# Altium PCB KCORES-FlexibleLOM-Adapter.pcbdoc
Units mm, origin at the board's own origin, x right, y up, seen from the top; angles counter-clockwise.
Board outline 131.32 x 67.56 mm, 2 copper layers (Top Layer, Bottom Layer); 3 components, 44 nets, 197 pads, 239 vias.
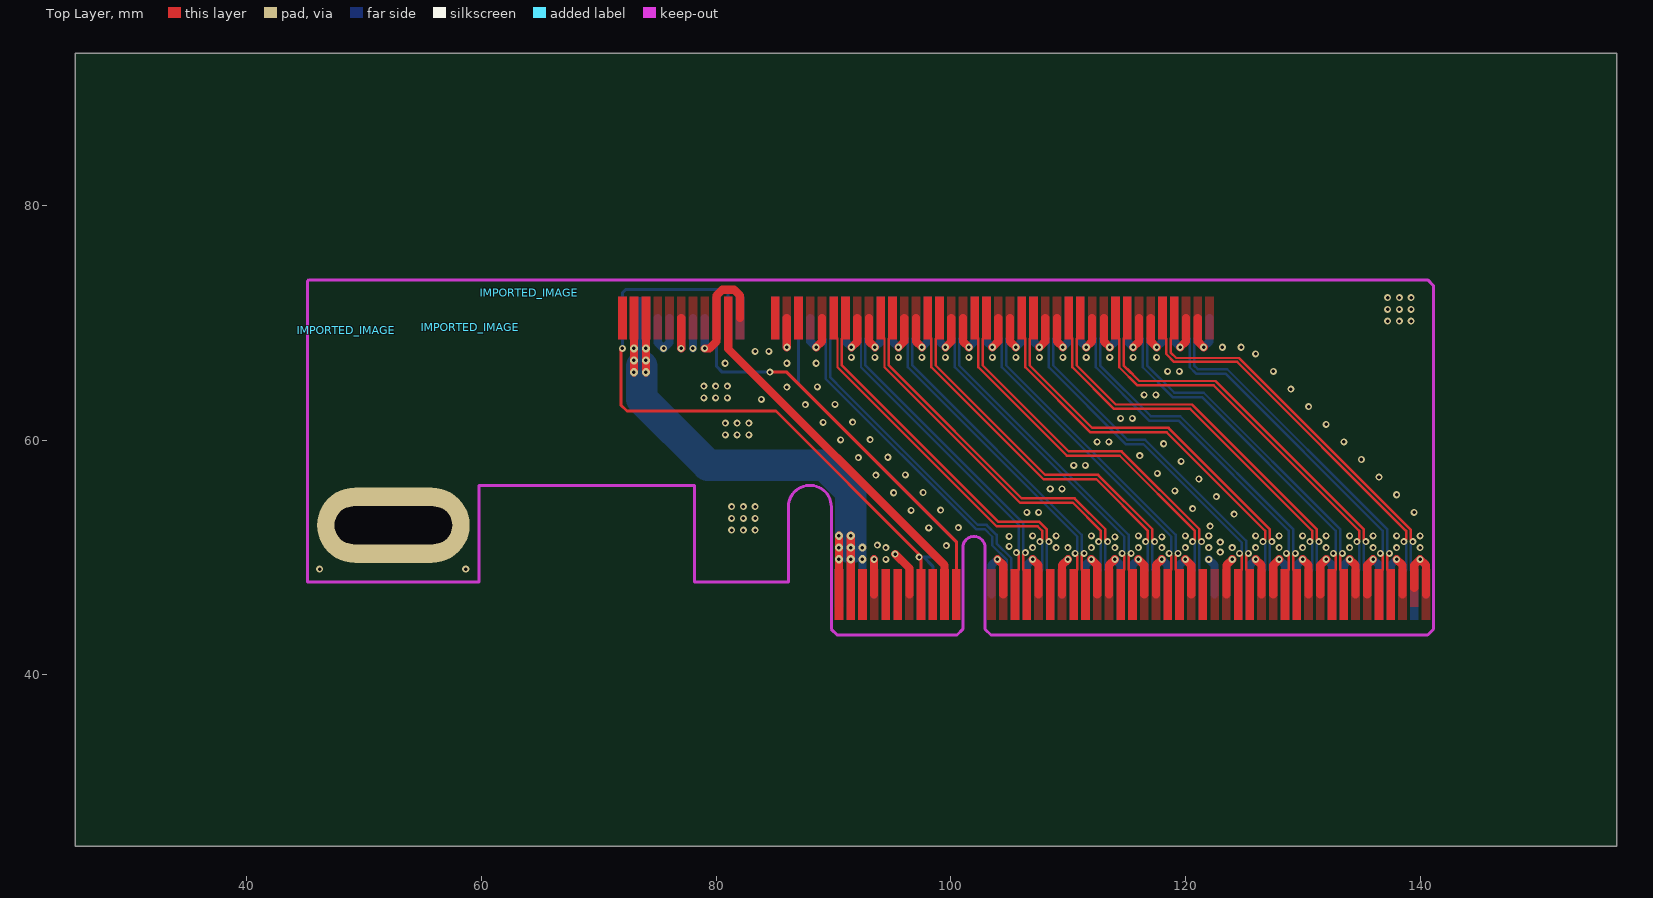
[diagram p0: Top Layer view]
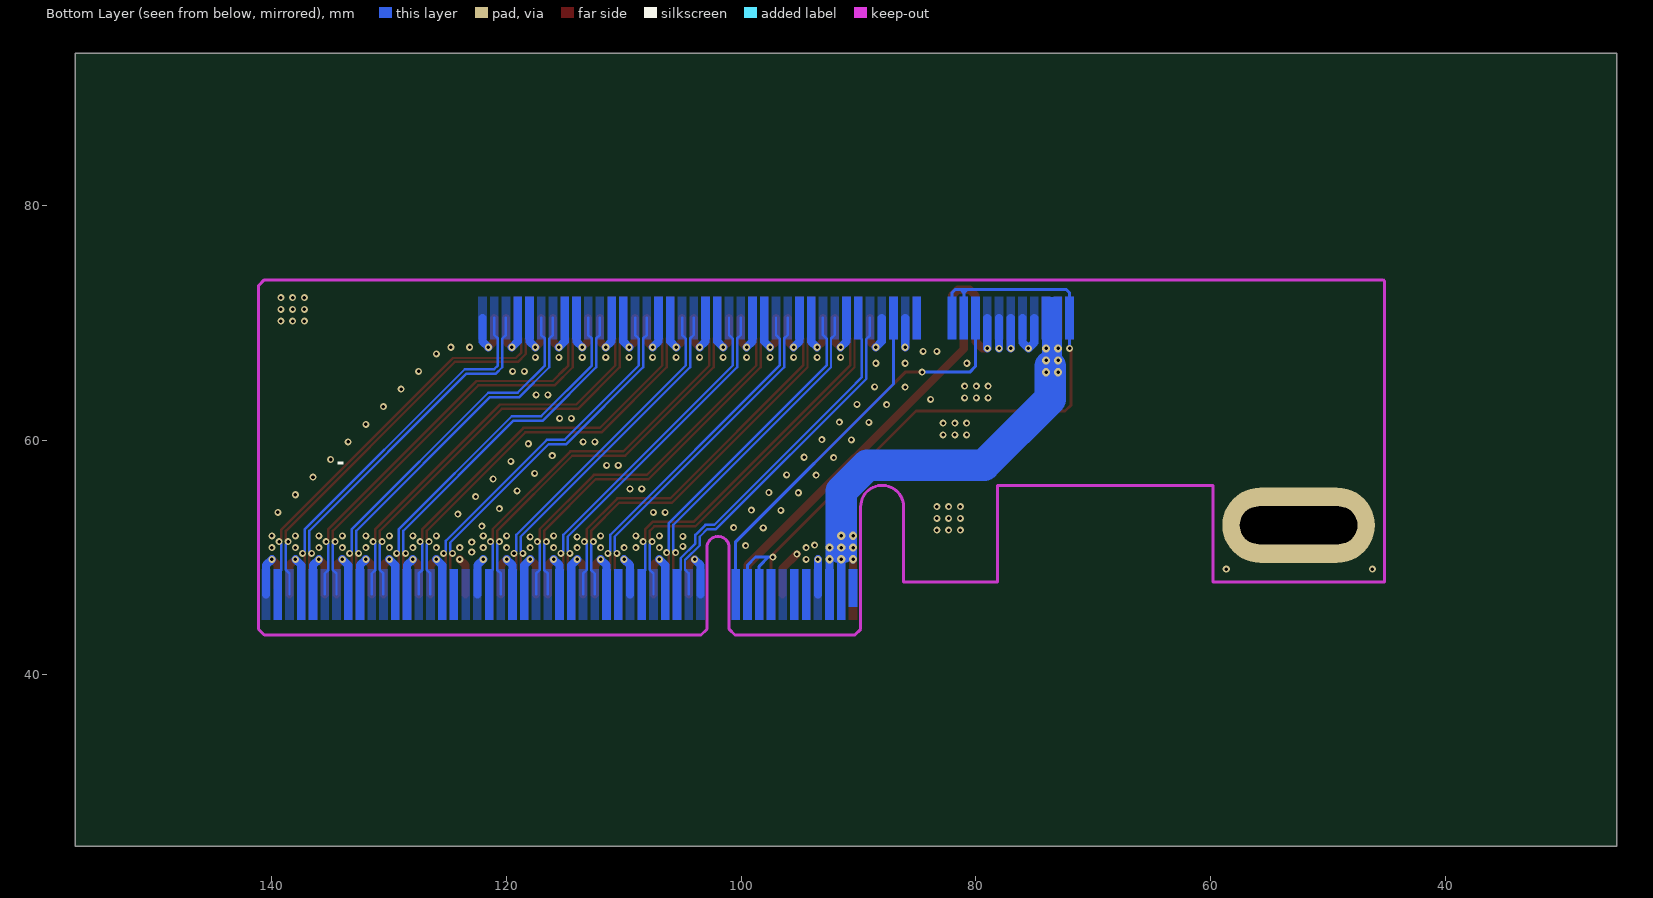
[diagram p1: Bottom Layer view, seen from below]

## Layer stack, top to bottom
Top Layer: signal copper (thickness not stored)
Dielectric: dielectric 0.32, FR-4, Dk 4.8
Bottom Layer: signal copper (thickness not stored)

## Board outline
156.718,25.4 25.4,25.4 25.4,92.964 156.718,92.964

## Components (designator, comment, footprint, x,y, rotation, side; value= is the part's Value field where it differs from the comment)
IMPORTED_IMAGE "IMPORTED_IMAGE" IMPORTED_IMAGE 48.513,69.378 r0 top
IMPORTED_IMAGE "IMPORTED_IMAGE" IMPORTED_IMAGE 59.067,69.615 r0 top
IMPORTED_IMAGE "IMPORTED_IMAGE" IMPORTED_IMAGE 64.1,72.542 r0 top

## Footprints (in the part's own frame and the unit in brackets; to place one, negate y for a bottom-side part, rotate by r counter-clockwise, add the part's x,y. Pads: shape width x height; smd on the part's side, far side on the other; paste and mask are expansions set on the pad)
IMPORTED_IMAGE [mm]

## Free pads (board coordinates)
  round 0 smd far side: A1(72.022,70.41) A1(90.456,47.4) A2(73.022,70.41) A2(91.456,46.85) A3(74.022,70.41) A3(92.456,46.85) A4(75.022,70.41) A4(93.456,46.85) A5(76.022,70.41) A5(94.456,46.85) A6(77.022,70.41) A6(95.456,46.85) A7(78.022,70.41) A7(96.456,46.85) A8(79.022,70.41) A8(97.456,46.85) A9(80.022,70.41) A9(98.456,46.85) A10(81.022,70.41) A10(99.456,46.85) A11(82.022,70.41) A11(100.456,46.85) A12(85.022,70.41) A12(103.456,46.85) A13(86.022,70.41) A13(104.456,46.85) A14(87.022,70.41) A14(105.456,46.85) A15(88.022,70.41) A15(106.456,46.85) A16(89.022,70.41) A16(107.456,46.85) A17(90.022,70.41) A17(108.456,46.85) A18(91.022,70.41) A18(109.456,46.85) A19(92.022,70.41) A19(110.456,46.85) A20(93.022,70.41) A20(111.456,46.85) A21(94.022,70.41) A21(112.456,46.85) A22(95.022,70.41) A22(113.456,46.85) A23(96.022,70.41) A23(114.456,46.85) A24(97.022,70.41) A24(115.456,46.85) A25(98.022,70.41) A25(116.456,46.85) A26(99.022,70.41) A26(117.456,46.85) A27(100.022,70.41) A27(118.456,46.85) A28(101.022,70.41) A28(119.456,46.85) A29(102.022,70.41) A29(120.456,46.85) A30(103.022,70.41) A30(121.456,46.85) A31(104.022,70.41) A31(122.456,46.85) A32(105.022,70.41) A32(123.456,46.85) A33(106.022,70.41) A33(124.456,46.85) A34(107.022,70.41) A34(125.456,46.85) A35(108.022,70.41) A35(126.456,46.85) A36(109.022,70.41) A36(127.456,46.85) A37(110.022,70.41) A37(128.456,46.85) A38(111.022,70.41) A38(129.456,46.85) A39(112.022,70.41) A39(130.456,46.85) A40(113.022,70.41) A40(131.456,46.85) A41(114.022,70.41) A41(132.456,46.85) A42(115.022,70.41) A42(133.456,46.85) A43(116.022,70.41) A43(134.456,46.85) A44(117.022,70.41) A44(135.456,46.85) A45(118.022,70.41) A45(136.456,46.85) A46(119.022,70.41) A46(137.456,46.85) A47(120.022,70.41) A47(138.456,46.85) A48(121.022,70.41) A48(139.456,46.85) A49(122.022,70.41) A49(140.456,46.85)
  round 0 smd: B1(72.022,70.41) B1(90.456,46.85) B2(72.995,70.41) B2(91.456,46.85) B3(74.022,70.41) B3(92.456,46.85) B4(75.022,70.41) B4(93.456,46.85) B5(76.022,70.41) B5(94.456,46.85) B6(77.022,70.41) B6(95.456,46.85) B7(78.022,70.41) B7(96.456,46.85) B8(79.022,70.41) B8(97.456,46.85) B9(80.022,70.41) B9(98.456,46.85) B10(81.022,70.41) B10(99.456,46.85) B11(82.022,70.41) B11(100.456,46.85) B12(85.022,70.41) B12(103.456,46.85) B13(86.022,70.41) B13(104.456,46.85) B14(87.022,70.41) B14(105.456,46.85) B15(88.022,70.41) B15(106.456,46.85) B16(89.022,70.41) B16(107.456,46.85) B17(90.022,70.41) B17(108.456,46.85) B18(91.022,70.41) B18(109.456,46.85) B19(92.022,70.41) B19(110.456,46.85) B20(93.022,70.41) B20(111.456,46.85) B21(94.022,70.41) B21(112.456,46.85) B22(95.022,70.41) B22(113.456,46.85) B23(96.022,70.41) B23(114.456,46.85) B24(97.022,70.41) B24(115.456,46.85) B25(98.022,70.41) B25(116.456,46.85) B26(99.022,70.41) B26(117.456,46.85) B27(100.022,70.41) B27(118.456,46.85) B28(101.022,70.41) B28(119.456,46.85) B29(102.022,70.41) B29(120.456,46.85) B30(103.022,70.41) B30(121.456,46.85) B31(104.022,70.41) B31(122.456,46.85) B32(105.022,70.41) B32(123.456,46.85) B33(106.022,70.41) B33(124.456,46.85) B34(107.022,70.41) B34(125.456,46.85) B35(108.022,70.41) B35(126.456,46.85) B36(109.022,70.41) B36(127.456,46.85) B37(110.022,70.41) B37(128.456,46.85) B38(111.022,70.41) B38(129.456,46.85) B39(112.022,70.41) B39(130.456,46.85) B40(113.022,70.41) B40(131.456,46.85) B41(114.022,70.41) B41(132.456,46.85) B42(115.022,70.41) B42(133.456,46.85) B43(116.022,70.41) B43(134.456,46.85) B44(117.022,70.41) B44(135.456,46.85) B45(118.022,70.41) B45(136.456,46.85) B46(119.022,70.41) B46(137.456,46.85) B47(120.022,70.41) B47(138.456,46.85) B48(121.022,70.41) B48(139.456,47.4) B49(122.022,70.41) B49(140.456,46.85)
  oval 13x6.4 hole 3.2 slot 10 at 0 deg: NETP1_31(52.506,52.75)

## Via types
v1: diameter 0.6, hole 0.3, Top Layer to Bottom Layer, 225 vias
v2: diameter 0.7, hole 0.3, Top Layer to Bottom Layer, 14 vias

## Nets (pads, with @x,y where several pads share a name; then routed paths per layer and width w, separated by ;. In a path a pad name is that pad's centre, name@x,y a point inside that pad or via, vN(x,y) a via of type N, cw(c..) or ccw(c..) an arc to the next point about the centre after c; other vN are vias at no path point)
3V3_AUX: pad.A10@99.456,46.85 pad.B10 | length 33.3
  Top Layer w0.7: 81.022,68.31 81.022,70.41 81.022,67.784 99.456,49.35 99.456,46.85
+3V3: pad.A1@72.022,70.41 pad.A8@97.456,46.85 pad.A9@98.456,46.85 pad.A10@81.022,70.41 pad.A11@82.022,70.41 pad.B1@72.022,70.41 pad.B8@97.456,46.85 pad.B9@98.456,46.85 | length 68.2
  Top Layer w0.254: v1(72.022,67.81) 71.882,67.81 71.882,62.992 72.399,62.475 85.099,62.475 97.456,50.118 97.456,46.85
  Bottom Layer w0.254: v1(72.022,67.81) 72.022,70.41 72.022,72.56 72.272,72.81 80.522,72.81 ; 81.022,70.41 81.022,72.56 ; 82.022,70.41 82.022,72.56 81.772,72.81 81.272,72.81 ; 98.456,46.85 98.456,49.254 97.672,50.038 v1(97.282,50.038) 98.768,50.038 99.456,49.35 99.456,46.85 ; 80.522,72.81 81.272,72.81 ; 80.522,72.81 80.772,72.81 81.022,72.56 ; 81.022,72.56 81.272,72.81
+12V: pad.A1@90.456,47.4 pad.A2 pad.A3 pad.B1@90.456,46.85 pad.B2 pad.B3@74.022,70.41 | length 68
  Top Layer w0.7: v2(72.995,65.786) v2(72.995,66.786) ; v2@72.995,66.81 72.995,70.41 ; v2@74.022,65.786 v2@74.022,66.786 ; v2@74.022,66.81 74.022,70.41 ; v2(90.456,49.85) 90.456,47.4 90.456,46.85 v2(90.456,50.85) v2(90.456,51.85) ; 91.456,46.85 v2(91.456,50.85) v2(91.456,51.85)
  Bottom Layer w0.7: v2@73.022,66.81 73.022,70.41 ; v2@74.022,66.81 74.022,70.41 ; v2(90.456,49.85) v2(90.456,50.85) ; 91.456,46.85 v2(91.456,50.85) v2(91.456,51.85) ; 92.456,46.85 v2(92.456,50.85)
  Bottom Layer w2.7: 73.66,66.294 73.66,63.5 79.31,57.85 89.247,57.85 91.456,55.642 v2(91.456,50.85)
  other v2: 91.456,49.85 92.456,49.85 74.022,65.786 74.022,66.786 72.995,67.81 74.022,67.81
CLK_N:  | length 31.1
  Bottom Layer w0.208: 89.923,65.145 102.282,52.786 103.032,52.786 103.891,51.927 103.891,51.185 105.141,49.935 105.141,48.965 105.456,48.65 105.456,46.85 ; 90.022,70.41 90.022,68.91 89.707,68.595 89.707,65.361 90.238,64.83
CLK_P:  | length 30.7
  Bottom Layer w0.208: 89.022,70.41 89.022,68.925 89.337,68.61 89.337,65.207 102.129,52.415 102.879,52.415 103.52,51.774 103.52,51.032 104.771,49.782 104.771,48.965 104.456,48.65 104.456,46.85
GND: pad.A4 pad.A5@76.022,70.41 pad.A6@77.022,70.41 pad.A7 pad.A8@79.022,70.41 pad.A12@103.456,46.85 pad.A13 pad.A15@88.022,70.41 pad.A16 pad.A18@109.456,46.85 pad.A19@92.022,70.41 pad.A20@93.022,70.41 pad.A21@112.456,46.85 pad.A22@113.456,46.85 pad.A23@96.022,70.41 pad.A24@97.022,70.41 pad.A25@116.456,46.85 pad.A26@117.456,46.85 pad.A27@100.022,70.41 pad.A28@101.022,70.41 pad.A29@120.456,46.85 pad.A31 pad.A32 pad.A35 pad.A36 pad.A39 pad.A40 pad.A43 pad.A44 pad.A47 pad.A48@121.022,70.41 pad.A49 pad.B4 pad.B5@76.022,70.41 pad.B6@77.022,70.41 pad.B7 pad.B8@79.022,70.41 pad.B9@80.022,70.41 pad.B11@82.022,70.41 pad.B12@103.456,46.85 pad.B13 pad.B15@88.022,70.41 pad.B16 pad.B18@109.456,46.85 pad.B19@92.022,70.41 pad.B20@93.022,70.41 pad.B21@112.456,46.85 pad.B22@113.456,46.85 pad.B23@96.022,70.41 pad.B24@97.022,70.41 pad.B25@116.456,46.85 pad.B26@117.456,46.85 pad.B27@100.022,70.41 pad.B28@101.022,70.41 pad.B29@120.456,46.85 pad.B31 pad.B32 pad.B35 pad.B36 pad.B39 pad.B40 pad.B43 pad.B44 pad.B47 pad.B48 pad.B49 | length 244.1
  Top Layer w0.7: v1(77.022,67.81) 77.022,70.41 ; v1(79.022,67.81) 79.431,67.81 80.022,68.401 80.022,70.41 80.022,72.31 80.522,72.81 81.522,72.81 82.022,72.31 82.022,70.41 ; v1(86.022,67.91) 86.022,70.41 ; v1(88.522,67.91) 89.022,68.41 89.022,70.41 ; v1(91.522,67.91) 92.022,68.41 92.022,70.41 ; 93.022,70.41 93.022,68.41 v1(93.522,67.91) ; 93.456,46.85 v1(93.456,49.85) ; v1(95.25,50.292) 96.456,49.086 96.456,46.85 ; v1(95.522,67.91) 96.022,68.41 96.022,70.41 ; 97.022,70.41 97.022,68.41 v1(97.522,67.91) ; v1(99.522,67.91) 100.022,68.41 100.022,70.41 ; 101.022,70.41 101.022,68.41 v1(101.522,67.91) ; v1(103.522,67.91) 104.022,68.41 104.022,70.41 ; v1(103.953,49.848) 104.456,49.345 104.456,46.85 ; 105.022,70.41 105.022,68.41 v1(105.522,67.91) ; v1(106.956,49.85) 107.456,49.35 107.456,46.85 ; v1(107.522,67.91) 108.022,68.41 108.022,70.41 ; 109.022,70.41 109.022,68.41 v1(109.522,67.91) ; 109.456,46.85 109.456,49.35 v1(109.956,49.85) ; v1(111.522,67.91) 112.022,68.41 112.022,70.41 ; v1(111.956,49.85) 112.456,49.35 112.456,46.85 ; 113.022,70.41 113.022,68.41 v1(113.522,67.91) ; 113.456,46.85 113.456,49.35 v1(113.956,49.85) ; v1(115.522,67.91) 116.022,68.41 116.022,70.41 ; v1(115.956,49.85) 116.456,49.35 116.456,46.85 ; 117.022,70.41 117.022,68.41 v1(117.522,67.91) ; 117.456,46.85 117.456,49.35 v1(117.956,49.85) ; v1(119.522,67.91) 120.022,68.41 120.022,70.41 ; v1(119.956,49.85) 120.456,49.35 120.456,46.85 ; 121.022,70.41 121.022,68.41 v1(121.522,67.91) ; 123.456,46.85 123.456,49.35 v1(123.956,49.85) ; v1(125.956,49.85) 126.456,49.35 126.456,46.85 ; 127.456,46.85 127.456,49.35 v1(127.956,49.85) ; v1(129.956,49.85) 130.456,49.35 130.456,46.85 ; 131.456,46.85 131.456,49.35 v1(131.956,49.85) ; v1(133.956,49.85) 134.456,49.35 134.456,46.85 ; 135.456,46.85 135.456,49.35 v1(135.956,49.85) ; v1(137.956,49.85) 138.456,49.35 138.456,46.85 ; 139.456,47.4 139.456,49.35 v1(139.956,49.85) 140.456,49.35 140.456,46.85
  Bottom Layer w0.7: 75.022,70.41 75.022,68.31 v1(75.522,67.81) 76.022,68.31 76.022,70.41 ; v1(77.022,67.81) 77.022,70.41 ; v1(78.022,67.81) 78.022,70.41 ; v1(79.022,67.81) 79.022,70.41 ; v1(86.022,67.91) 86.022,70.41 ; 88.022,70.41 88.022,68.41 v1(88.522,67.91) ; 91.022,70.41 91.022,68.41 v1(91.522,67.91) ; 93.456,46.85 v1(93.456,49.85) ; v1(93.522,67.91) 94.022,68.41 94.022,70.41 ; 95.022,70.41 95.022,68.41 v1(95.522,67.91) ; v1(97.522,67.91) 98.022,68.41 98.022,70.41 ; 99.022,70.41 99.022,68.41 v1(99.522,67.91) ; v1(101.522,67.91) 102.022,68.41 102.022,70.41 ; 103.022,70.41 103.022,68.41 v1(103.522,67.91) ; 103.456,46.85 103.456,49.35 v1@103.918,49.812 ; v1(105.522,67.91) 106.022,68.41 106.022,70.41 ; 106.456,46.85 106.456,49.35 v1(106.956,49.85) ; 107.022,70.41 107.022,68.41 v1(107.522,67.91) ; 109.456,46.85 109.456,49.35 v1(109.956,49.85) ; v1(109.522,67.91) 110.022,68.41 110.022,70.41 ; 111.022,70.41 111.022,68.41 v1(111.522,67.91) ; 111.456,46.85 111.456,49.35 v1(111.956,49.85) ; v1(113.522,67.91) 114.022,68.41 114.022,70.41 ; v1(113.956,49.85) 114.456,49.35 114.456,46.85 ; 115.022,70.41 115.022,68.41 v1(115.522,67.91) ; 115.456,46.85 115.456,49.35 v1(115.956,49.85) ; v1(117.522,67.91) 118.022,68.41 118.022,70.41 ; v1(117.956,49.85) 118.456,49.35 118.456,46.85 ; 119.022,70.41 119.022,68.41 v1(119.522,67.91) ; 119.456,46.85 119.456,49.35 v1(119.956,49.85) ; v1(121.522,67.91) 122.022,68.41 122.022,70.41 ; v1(121.956,49.85) 122.456,49.35 122.456,46.85 ; 125.456,46.85 125.456,49.35 v1(125.956,49.85) ; v1(127.956,49.85) 128.456,49.35 128.456,46.85 ; 129.456,46.85 129.456,49.35 v1(129.956,49.85) ; v1(131.956,49.85) 132.456,49.35 132.456,46.85 ; 133.456,46.85 133.456,49.35 v1(133.956,49.85) ; v1(135.956,49.85) 136.456,49.35 136.456,46.85 ; 137.456,46.85 137.456,49.35 v1(137.956,49.85) ; v1(139.956,49.85) 140.456,49.35 140.456,46.85
  other v1: 46.228,49.022 58.674,49.022 94.456,49.85 122.936,50.454 94.456,50.85 106.956,50.85 108.956,50.85 109.956,50.85 111.956,50.85 113.956,50.85 115.956,50.85 117.956,50.85 119.956,50.85 121.956,50.85 123.956,50.85 125.956,50.85 127.956,50.85 129.956,50.85 131.956,50.85 133.956,50.85 135.956,50.85 137.956,50.85 139.956,50.85 104.956,50.95 99.607,51.019 93.726,51.054 122.936,51.308 113.956,51.75 117.956,51.75 104.956,51.804 106.956,51.85 108.956,51.85 111.956,51.85 115.956,51.85 119.956,51.85 121.956,51.85 125.956,51.85 127.956,51.85 129.956,51.85 131.956,51.85 133.956,51.85 135.956,51.85 137.956,51.85 139.956,51.85 81.312,52.34 82.312,52.34 83.312,52.34 98.107,52.519 100.622,52.54 122.077,52.674 81.312,53.34 82.312,53.34 83.312,53.34 124.109,53.69 106.456,53.85 107.456,53.85 139.455,53.849 96.607,54.018 99.122,54.04 120.578,54.174 81.312,54.34 82.312,54.34 83.312,54.34 122.61,55.19 137.955,55.349 95.107,55.518 97.622,55.54 119.078,55.674 108.456,55.85 109.456,55.85 121.11,56.69 136.455,56.85 93.607,57.018 96.122,57.04 117.578,57.174 110.456,57.85 111.456,57.85 119.61,58.19 134.955,58.35 92.106,58.517 94.622,58.54 116.078,58.674 118.11,59.69 112.456,59.85 113.456,59.85 133.455,59.85 90.606,60.017 93.122,60.04 80.788,60.452 81.788,60.452 82.788,60.452 131.955,61.35 80.788,61.452 81.788,61.452 82.788,61.452 89.106,61.517 91.622,61.54 114.456,61.85 115.456,61.85 130.455,62.85 87.606,63.016 90.122,63.04 83.844,63.476 78.956,63.6 79.956,63.6 80.956,63.6 116.456,63.85 117.456,63.85 128.956,64.35 86.022,64.516 88.622,64.54 78.956,64.6 79.956,64.6 80.956,64.6 118.456,65.85 119.456,65.85 127.456,65.85 80.772,66.548 86.022,66.548 88.522,66.548 91.522,67.056 93.522,67.056 95.522,67.056 97.522,67.056 99.522,67.056 101.522,67.056 103.522,67.056 105.522,67.056 107.522,67.056 109.522,67.056 111.522,67.056 113.522,67.056 115.522,67.056 117.522,67.056 125.956,67.35 83.312,67.564 84.499,67.564 123.118,67.91 124.714,67.91 137.192,70.136 138.192,70.136 139.192,70.136 137.192,71.136 138.192,71.136 139.192,71.136 137.192,72.136 138.192,72.136 139.192,72.136
NET-(H1-PAD1): pad.NETP1_31
NG: pad.B3@92.456,46.85
NPERST: pad.A14@87.022,70.41 pad.B14@87.022,70.41 | length 29.1
  Bottom Layer w0.254: 87.022,70.41 87.022,64.784 100.456,51.35 100.456,46.85
NWAKE: pad.A9@80.022,70.41 pad.A11@100.456,46.85 pad.B11@100.456,46.85 | length 35.2
  Top Layer w0.254: v1(84.582,65.786) 86.02,65.786 100.456,51.35 100.456,46.85
  Bottom Layer w0.254: 80.022,70.41 80.022,66.282 80.518,65.786 v1(84.582,65.786)
RX0_N: pad.A17@108.456,46.85 pad.A18@91.022,70.41 pad.B17@108.456,46.85 pad.B18@91.022,70.41 | length 33.3
  Top Layer w0.208: 91.022,70.41 91.022,68.96 90.707,68.645 90.707,66.361 104.032,53.035 107.532,53.035 108.141,52.427 108.141,51.546 v1(108.337,51.35)
  Bottom Layer w0.208: v1(108.337,51.35) 108.141,51.154 108.141,48.95 108.456,48.635 108.456,46.85
RX0_P: pad.A17@90.022,70.41 pad.B17@90.022,70.41 | length 33.3
  Top Layer w0.208: 90.022,70.41 90.022,68.96 90.337,68.645 90.337,66.207 103.879,52.665 107.379,52.665 107.771,52.274 107.771,51.546 v1(107.575,51.35)
  Bottom Layer w0.208: 107.456,46.85 107.456,48.635 107.771,48.95 107.771,51.154 v1(107.575,51.35)
RX1_N: pad.A22@95.022,70.41 pad.B22@95.022,70.41 | length 34.3
  Top Layer w0.208: 95.022,70.41 95.022,68.96 94.707,68.645 94.707,66.361 106.032,55.035 110.532,55.035 113.141,52.427 113.141,51.546 v1(113.337,51.35)
  Bottom Layer w0.208: v1(113.337,51.35) 113.141,51.154 113.141,48.95 113.456,48.635 113.456,46.85
RX1_P: pad.A21@94.022,70.41 pad.B21@94.022,70.41 | length 34.3
  Top Layer w0.208: 94.022,70.41 94.022,68.96 94.337,68.645 94.337,66.208 105.879,54.665 110.379,54.665 112.771,52.274 112.771,51.546 v1(112.575,51.35)
  Bottom Layer w0.208: 112.456,46.85 112.456,48.635 112.771,48.95 112.771,51.154 v1(112.575,51.35)
RX2_N: pad.A26@99.022,70.41 pad.B26@99.022,70.41 | length 34.3
  Top Layer w0.208: 99.022,70.41 99.022,68.96 98.707,68.645 98.707,66.361 108.032,57.035 112.532,57.035 117.141,52.427 117.141,51.546 v1(117.337,51.35)
  Bottom Layer w0.208: v1(117.337,51.35) 117.141,51.154 117.141,48.95 117.456,48.635 117.456,46.85
RX2_P: pad.A25@98.022,70.41 pad.B25@98.022,70.41 | length 34.3
  Top Layer w0.208: 98.022,70.41 98.022,68.96 98.337,68.645 98.337,66.207 107.879,56.665 112.379,56.665 116.771,52.274 116.771,51.546 v1(116.575,51.35)
  Bottom Layer w0.208: 116.456,46.85 116.456,48.635 116.771,48.95 116.771,51.154 v1(116.575,51.35)
RX3_N: pad.A30 pad.B30 | length 34.3
  Top Layer w0.208: 103.022,70.41 103.022,68.96 102.707,68.645 102.707,66.361 110.032,59.035 114.532,59.035 121.141,52.427 121.141,51.546 v1(121.337,51.35)
  Bottom Layer w0.208: v1(121.337,51.35) 121.141,51.154 121.141,48.95 121.456,48.635 121.456,46.85
RX3_P: pad.A29@102.022,70.41 pad.B29@102.022,70.41 | length 34.3
  Top Layer w0.208: 102.022,70.41 102.022,68.96 102.337,68.645 102.337,66.207 109.879,58.665 114.379,58.665 120.771,52.274 120.771,51.546 v1(120.575,51.35)
  Bottom Layer w0.208: 120.456,46.85 120.456,48.635 120.771,48.95 120.771,51.154 v1(120.575,51.35)
RX4_N: pad.A34@107.022,70.41 pad.B34@107.022,70.41 | length 36.3
  Top Layer w0.208: 107.022,70.41 107.022,68.96 106.707,68.645 106.707,66.361 112.032,61.035 118.532,61.035 127.141,52.427 127.141,51.546 v1(127.337,51.35)
  Bottom Layer w0.208: v1(127.337,51.35) 127.141,51.154 127.141,48.95 127.456,48.635 127.456,46.85
RX4_P: pad.A33@106.022,70.41 pad.B33@106.022,70.41 | length 36.3
  Top Layer w0.208: 106.022,70.41 106.022,68.96 106.337,68.645 106.337,66.207 111.879,60.665 118.379,60.665 126.771,52.274 126.771,51.546 v1(126.575,51.35)
  Bottom Layer w0.208: 126.456,46.85 126.456,48.635 126.771,48.95 126.771,51.154 v1(126.575,51.35)
RX5_N: pad.A38@111.022,70.41 pad.B38@111.022,70.41 | length 36.3
  Top Layer w0.208: 111.022,70.41 111.022,68.96 110.707,68.645 110.707,66.361 114.032,63.035 120.532,63.035 131.141,52.427 131.141,51.546 v1(131.337,51.35)
  Bottom Layer w0.208: v1(131.337,51.35) 131.141,51.154 131.141,48.95 131.456,48.635 131.456,46.85
RX5_P: pad.A37@110.022,70.41 pad.B37@110.022,70.41 | length 36.3
  Top Layer w0.208: 110.022,70.41 110.022,68.96 110.337,68.645 110.337,66.207 113.879,62.665 120.379,62.665 130.771,52.274 130.771,51.546 v1(130.575,51.35)
  Bottom Layer w0.208: 130.456,46.85 130.456,48.635 130.771,48.95 130.771,51.154 v1(130.575,51.35)
RX6_N: pad.A42@115.022,70.41 pad.B42@115.022,70.41 | length 37.7
  Top Layer w0.208: 115.022,70.41 115.022,68.96 114.707,68.645 114.707,66.361 116.032,65.035 ; 115.025,66.043 116.032,65.035 ; v1(135.337,51.35) 135.141,51.546 135.141,52.427 122.532,65.035 116.032,65.035
  Bottom Layer w0.208: v1(135.337,51.35) 135.141,51.154 135.141,48.95 135.456,48.635 135.456,46.85
RX6_P: pad.A41@114.022,70.41 pad.B41@114.022,70.41 | length 36.3
  Top Layer w0.208: 114.022,70.41 114.022,68.96 114.337,68.645 114.337,66.207 115.879,64.665 122.379,64.665 134.771,52.274 134.771,51.546 v1(134.575,51.35)
  Bottom Layer w0.208: 134.456,46.85 134.456,48.635 134.771,48.95 134.771,51.154 v1(134.575,51.35)
RX7_N: pad.A46@119.022,70.41 pad.A48@139.456,46.85 pad.B46@119.022,70.41 | length 35.6
  Top Layer w0.208: 119.022,70.41 119.022,68.96 118.707,68.645 118.707,67.475 119.187,66.995 124.521,66.995 139.141,52.375 139.141,51.546 v1(139.337,51.35)
  Bottom Layer w0.208: v1(139.337,51.35) 139.141,51.154 139.141,48.95 139.456,48.635 139.456,46.85
RX7_P: pad.A45@118.022,70.41 pad.B45@118.022,70.41 | length 35.6
  Top Layer w0.208: 118.022,70.41 118.022,68.96 118.337,68.645 118.337,67.337 119.009,66.665 124.379,66.665 138.771,52.274 138.771,51.546 v1(138.575,51.35)
  Bottom Layer w0.208: 138.456,46.85 138.456,48.635 138.771,48.95 138.771,51.154 v1(138.575,51.35)
S$4667: 
S$4669: 
TX0_N: pad.A15@106.456,46.85 pad.B15@106.456,46.85 | length 29.5
  Top Layer w0.208: v1(106.337,50.41) 106.141,50.214 106.141,48.965 106.456,48.65 106.456,46.85
  Bottom Layer w0.208: 93.022,70.41 93.022,68.96 92.707,68.645 92.707,66.361 106.141,52.927 106.141,50.606 v1(106.337,50.41)
TX0_P: pad.A14@105.456,46.85 pad.B14@105.456,46.85 | length 29.5
  Top Layer w0.208: 105.456,46.85 105.456,48.65 105.771,48.965 105.771,50.214 v1(105.575,50.41)
  Bottom Layer w0.208: 92.022,70.41 92.022,68.96 92.337,68.645 92.337,66.207 105.771,52.774 105.771,50.606 v1(105.575,50.41)
TX1_N: pad.A20@111.456,46.85 pad.B20@111.456,46.85 | length 30
  Top Layer w0.208: v1(111.337,50.35) 111.141,50.154 111.141,48.965 111.456,48.65 111.456,46.85
  Bottom Layer w0.208: 97.022,70.41 97.022,68.96 96.707,68.645 96.707,66.361 111.141,51.927 111.141,50.546 v1(111.337,50.35)
TX1_P: pad.A19@110.456,46.85 pad.B19@110.456,46.85 | length 30
  Top Layer w0.208: 110.456,46.85 110.456,48.65 110.771,48.965 110.771,50.154 v1(110.575,50.35)
  Bottom Layer w0.208: 96.022,70.41 96.022,68.96 96.337,68.645 96.337,66.207 110.771,51.774 110.771,50.546 v1(110.575,50.35)
TX2_N: pad.A24@115.456,46.85 pad.B24@115.456,46.85 | length 30
  Top Layer w0.208: v1(115.337,50.35) 115.141,50.154 115.141,48.965 115.456,48.65 115.456,46.85
  Bottom Layer w0.208: 101.022,70.41 101.022,68.96 100.707,68.645 100.707,66.361 115.141,51.927 115.141,50.546 v1(115.337,50.35)
TX2_P: pad.A23@114.456,46.85 pad.B23@114.456,46.85 | length 30
  Top Layer w0.208: 114.456,46.85 114.456,48.65 114.771,48.965 114.771,50.154 v1(114.575,50.35)
  Bottom Layer w0.208: 100.022,70.41 100.022,68.96 100.337,68.645 100.337,66.208 114.771,51.774 114.771,50.546 v1(114.575,50.35)
TX3_N: pad.A28@119.456,46.85 pad.B28@119.456,46.85 | length 30
  Top Layer w0.208: v1(119.337,50.35) 119.141,50.154 119.141,48.965 119.456,48.65 119.456,46.85
  Bottom Layer w0.208: 105.022,70.41 105.022,68.96 104.707,68.645 104.707,66.361 119.141,51.927 119.141,50.546 v1(119.337,50.35)
TX3_P: pad.A27@118.456,46.85 pad.B27@118.456,46.85 | length 30
  Top Layer w0.208: 118.456,46.85 118.456,48.65 118.771,48.965 118.771,50.154 v1(118.575,50.35)
  Bottom Layer w0.208: 104.022,70.41 104.022,68.96 104.337,68.645 104.337,66.207 118.771,51.774 118.771,50.546 v1(118.575,50.35)
TX4_N: pad.A34@125.456,46.85 pad.B34@125.456,46.85 | length 31.7
  Top Layer w0.208: v1(125.337,50.35) 125.141,50.154 125.141,48.965 125.456,48.65 125.456,46.85
  Bottom Layer w0.208: 109.022,70.41 109.022,68.96 108.707,68.645 108.707,66.361 115.032,60.035 116.532,60.035 125.141,51.427 125.141,50.546 v1(125.337,50.35)
TX4_P: pad.A33@124.456,46.85 pad.B33@124.456,46.85 | length 31.7
  Top Layer w0.208: 124.456,46.85 124.456,48.65 124.771,48.965 124.771,50.154 v1(124.575,50.35)
  Bottom Layer w0.208: 108.022,70.41 108.022,68.96 108.337,68.645 108.337,66.207 114.879,59.665 116.379,59.665 124.771,51.274 124.771,50.546 v1(124.575,50.35)
TX5_N: pad.A38@129.456,46.85 pad.B38@129.456,46.85 | length 32.3
  Top Layer w0.208: v1(129.337,50.35) 129.141,50.154 129.141,48.965 129.456,48.65 129.456,46.85
  Bottom Layer w0.208: 113.022,70.41 113.022,68.96 112.707,68.645 112.707,66.361 117.032,62.035 119.532,62.035 129.141,52.427 129.141,50.546 v1(129.337,50.35)
TX5_P: pad.A37@128.456,46.85 pad.B37@128.456,46.85 | length 32.3
  Top Layer w0.208: 128.456,46.85 128.456,48.65 128.771,48.965 128.771,50.154 v1(128.575,50.35)
  Bottom Layer w0.208: 112.022,70.41 112.022,68.96 112.337,68.645 112.337,66.207 116.879,61.665 119.379,61.665 128.771,52.274 128.771,50.546 v1(128.575,50.35)
TX6_N: pad.A42@133.456,46.85 pad.B42@133.456,46.85 | length 32.3
  Top Layer w0.208: v1(133.337,50.35) 133.141,50.154 133.141,48.965 133.456,48.65 133.456,46.85
  Bottom Layer w0.208: 117.022,70.41 117.022,68.96 116.707,68.645 116.707,66.361 119.032,64.035 121.532,64.035 133.141,52.427 133.141,50.546 v1(133.337,50.35)
TX6_P: pad.A41@132.456,46.85 pad.B41@132.456,46.85 | length 32.3
  Top Layer w0.208: 132.456,46.85 132.456,48.65 132.771,48.965 132.771,50.154 v1(132.575,50.35)
  Bottom Layer w0.208: 116.022,70.41 116.022,68.96 116.337,68.645 116.337,66.207 118.879,63.665 121.379,63.665 132.771,52.274 132.771,50.546 v1(132.575,50.35)
TX7_N: pad.A46@137.456,46.85 pad.B46@137.456,46.85 | length 32.3
  Top Layer w0.208: v1(137.337,50.35) 137.141,50.154 137.141,48.965 137.456,48.65 137.456,46.85
  Bottom Layer w0.208: 121.022,70.41 121.022,68.96 120.707,68.645 120.707,66.361 121.032,66.035 123.532,66.035 137.141,52.427 137.141,50.546 v1(137.337,50.35)
TX7_P: pad.A45@136.456,46.85 pad.B45@136.456,46.85 | length 32.3
  Top Layer w0.208: 136.456,46.85 136.456,48.65 136.771,48.965 136.771,50.154 v1(136.575,50.35)
  Bottom Layer w0.208: 120.022,70.41 120.022,68.96 120.337,68.645 120.337,66.207 120.879,65.665 123.379,65.665 136.771,52.274 136.771,50.546 v1(136.575,50.35)

## Polygon pours and split planes (outlines as drawn)
GND on Bottom Layer (solid): 88.9,49.022 143.51,49.022 144.018,49.53 144.018,76.708 140.462,80.264 38.1,80.264 38.608,79.756 38.608,38.1 44.958,44.45 86.868,44.45
GND on Top Layer (solid): 88.9,49.022 143.51,49.022 144.018,49.53 144.018,76.708 140.462,80.264 38.1,80.264 38.608,79.756 38.608,38.1 44.958,44.45 86.868,44.45

## Keep-outs
Keep-Out Layer:
  lines w0.254: 86.156,54.325 cw(c87.981,54.325) 89.806,54.325 ; 101.006,50.85 cw(c101.956,50.85) 102.906,50.85

## Other copper
Top Layer:
  region net +3V3: 71.672,72.21 72.372,72.21 72.372,68.61 71.672,68.61
  region net +12V: 72.645,72.21 73.345,72.21 73.345,68.61 72.645,68.61
  region net +12V: 73.672,72.21 74.372,72.21 74.372,68.61 73.672,68.61
  region net 3V3_AUX: 80.672,72.21 81.372,72.21 81.372,68.61 80.672,68.61
  region: 84.672,72.21 85.372,72.21 85.372,68.61 84.672,68.61
  region net NPERST: 86.672,72.21 87.372,72.21 87.372,68.61 86.672,68.61
  region net RX0_P: 89.672,72.21 90.372,72.21 90.372,68.61 89.672,68.61
  region net RX0_N: 90.672,72.21 91.372,72.21 91.372,68.61 90.672,68.61
  region net RX1_P: 93.672,72.21 94.372,72.21 94.372,68.61 93.672,68.61
  region net RX1_N: 94.672,72.21 95.372,72.21 95.372,68.61 94.672,68.61
  region net RX2_P: 97.672,72.21 98.372,72.21 98.372,68.61 97.672,68.61
  region net RX2_N: 98.672,72.21 99.372,72.21 99.372,68.61 98.672,68.61
  region net RX3_P: 101.672,72.21 102.372,72.21 102.372,68.61 101.672,68.61
  region net RX3_N: 102.672,72.21 103.372,72.21 103.372,68.61 102.672,68.61
  region net RX4_P: 105.672,72.21 106.372,72.21 106.372,68.61 105.672,68.61
  region net RX4_N: 106.672,72.21 107.372,72.21 107.372,68.61 106.672,68.61
  region net RX5_P: 109.672,72.21 110.372,72.21 110.372,68.61 109.672,68.61
  region net RX5_N: 110.672,72.21 111.372,72.21 111.372,68.61 110.672,68.61
  region net RX6_P: 113.672,72.21 114.372,72.21 114.372,68.61 113.672,68.61
  region net RX6_N: 114.672,72.21 115.372,72.21 115.372,68.61 114.672,68.61
  region net RX7_P: 117.672,72.21 118.372,72.21 118.372,68.61 117.672,68.61
  region net RX7_N: 118.672,72.21 119.372,72.21 119.372,68.61 118.672,68.61
  region net TX7_N: 137.106,49 137.806,49 137.806,44.7 137.106,44.7
  region net TX7_P: 136.106,49 136.806,49 136.806,44.7 136.106,44.7
  region net TX6_N: 133.106,49 133.806,49 133.806,44.7 133.106,44.7
  region net TX6_P: 132.106,49 132.806,49 132.806,44.7 132.106,44.7
  region net TX5_N: 129.106,49 129.806,49 129.806,44.7 129.106,44.7
  region net TX5_P: 128.106,49 128.806,49 128.806,44.7 128.106,44.7
  region net TX4_N: 125.106,49 125.806,49 125.806,44.7 125.106,44.7
  region net TX4_P: 124.106,49 124.806,49 124.806,44.7 124.106,44.7
  region net RX3_N: 121.106,49 121.806,49 121.806,44.7 121.106,44.7
  region net TX3_N: 119.106,49 119.806,49 119.806,44.7 119.106,44.7
  region net TX3_P: 118.106,49 118.806,49 118.806,44.7 118.106,44.7
  region net TX2_N: 115.106,49 115.806,49 115.806,44.7 115.106,44.7
  region net TX2_P: 114.106,49 114.806,49 114.806,44.7 114.106,44.7
  region net TX1_N: 111.106,49 111.806,49 111.806,44.7 111.106,44.7
  region net TX1_P: 110.106,49 110.806,49 110.806,44.7 110.106,44.7
  region net +12V: 90.106,49 90.806,49 90.806,44.7 90.106,44.7
  region net +12V: 91.106,49 91.806,49 91.806,44.7 91.106,44.7
  region net NG: 92.106,49 92.806,49 92.806,44.7 92.106,44.7
  region: 94.106,49 94.806,49 94.806,44.7 94.106,44.7
  region: 95.106,49 95.806,49 95.806,44.7 95.106,44.7
  region net +3V3: 97.106,49 97.806,49 97.806,44.7 97.106,44.7
  region net +3V3: 98.106,49 98.806,49 98.806,44.7 98.106,44.7
  region net 3V3_AUX: 99.106,49 99.806,49 99.806,44.7 99.106,44.7
  region net NWAKE: 100.106,49 100.806,49 100.806,44.7 100.106,44.7
  region net TX0_P: 105.106,49 105.806,49 105.806,44.7 105.106,44.7
  region net TX0_N: 106.106,49 106.806,49 106.806,44.7 106.106,44.7
  region net RX0_N: 108.106,49 108.806,49 108.806,44.7 108.106,44.7
Bottom Layer:
  region net +3V3: 71.672,72.21 72.372,72.21 72.372,68.61 71.672,68.61
  region net +12V: 72.672,72.21 73.372,72.21 73.372,68.61 72.672,68.61
  region net +12V: 73.672,72.21 74.372,72.21 74.372,68.61 73.672,68.61
  region net NWAKE: 79.672,72.21 80.372,72.21 80.372,68.61 79.672,68.61
  region net +3V3: 80.672,72.21 81.372,72.21 81.372,68.61 80.672,68.61
  region net +3V3: 81.672,72.21 82.372,72.21 82.372,68.61 81.672,68.61
  region: 84.672,72.21 85.372,72.21 85.372,68.61 84.672,68.61
  region net NPERST: 86.672,72.21 87.372,72.21 87.372,68.61 86.672,68.61
  region net RX0_P: 89.672,72.21 90.372,72.21 90.372,68.61 89.672,68.61
  region net RX0_N: 90.672,72.21 91.372,72.21 91.372,68.61 90.672,68.61
  region net RX1_P: 93.672,72.21 94.372,72.21 94.372,68.61 93.672,68.61
  region net RX1_N: 94.672,72.21 95.372,72.21 95.372,68.61 94.672,68.61
  region net RX2_P: 97.672,72.21 98.372,72.21 98.372,68.61 97.672,68.61
  region net RX2_N: 98.672,72.21 99.372,72.21 99.372,68.61 98.672,68.61
  region net RX3_P: 101.672,72.21 102.372,72.21 102.372,68.61 101.672,68.61
  region net RX3_N: 102.672,72.21 103.372,72.21 103.372,68.61 102.672,68.61
  region net RX4_P: 105.672,72.21 106.372,72.21 106.372,68.61 105.672,68.61
  region net RX4_N: 106.672,72.21 107.372,72.21 107.372,68.61 106.672,68.61
  region net RX5_P: 109.672,72.21 110.372,72.21 110.372,68.61 109.672,68.61
  region net RX5_N: 110.672,72.21 111.372,72.21 111.372,68.61 110.672,68.61
  region net RX6_P: 113.672,72.21 114.372,72.21 114.372,68.61 113.672,68.61
  region net RX6_N: 114.672,72.21 115.372,72.21 115.372,68.61 114.672,68.61
  region net RX7_P: 117.672,72.21 118.372,72.21 118.372,68.61 117.672,68.61
  region net RX7_N: 118.672,72.21 119.372,72.21 119.372,68.61 118.672,68.61
  rectangle net +12V: 72.666,64.072 74.366,72.2
  region net TX6_P: 132.106,49 132.806,49 132.806,44.7 132.106,44.7
  region net TX5_N: 129.106,49 129.806,49 129.806,44.7 129.106,44.7
  region net TX5_P: 128.106,49 128.806,49 128.806,44.7 128.106,44.7
  region net TX4_N: 125.106,49 125.806,49 125.806,44.7 125.106,44.7
  region net TX4_P: 124.106,49 124.806,49 124.806,44.7 124.106,44.7
  region net RX3_N: 121.106,49 121.806,49 121.806,44.7 121.106,44.7
  region net TX3_N: 119.106,49 119.806,49 119.806,44.7 119.106,44.7
  region net TX3_P: 118.106,49 118.806,49 118.806,44.7 118.106,44.7
  region net TX2_N: 115.106,49 115.806,49 115.806,44.7 115.106,44.7
  region net TX2_P: 114.106,49 114.806,49 114.806,44.7 114.106,44.7
  region net TX1_N: 111.106,49 111.806,49 111.806,44.7 111.106,44.7
  region net TX1_P: 110.106,49 110.806,49 110.806,44.7 110.106,44.7
  region net +12V: 90.106,49 90.806,49 90.806,45.8 90.106,45.8
  region net +12V: 91.106,49 91.806,49 91.806,44.7 91.106,44.7
  region net +12V: 92.106,49 92.806,49 92.806,44.7 92.106,44.7
  region: 94.106,49 94.806,49 94.806,44.7 94.106,44.7
  region: 95.106,49 95.806,49 95.806,44.7 95.106,44.7
  region net +3V3: 97.106,49 97.806,49 97.806,44.7 97.106,44.7
  region net +3V3: 98.106,49 98.806,49 98.806,44.7 98.106,44.7
  region net 3V3_AUX: 99.106,49 99.806,49 99.806,44.7 99.106,44.7
  region net NWAKE: 100.106,49 100.806,49 100.806,44.7 100.106,44.7
  region net TX0_P: 105.106,49 105.806,49 105.806,44.7 105.106,44.7
  region net TX0_N: 106.106,49 106.806,49 106.806,44.7 106.106,44.7
  region net RX0_N: 108.106,49 108.806,49 108.806,44.7 108.106,44.7
  region net TX6_N: 133.106,49 133.806,49 133.806,44.7 133.106,44.7
  region net TX7_P: 136.106,49 136.806,49 136.806,44.7 136.106,44.7
  region net TX7_N: 137.106,49 137.806,49 137.806,44.7 137.106,44.7
  region net RX7_N: 139.106,49 139.806,49 139.806,44.7 139.106,44.7

## Silkscreen, mask and mechanical layers (free items; w line width, h text height)
Bottom Overlay:
  rectangle: 133.858,57.912 134.366,58.166
Top Paste:
  drawing of 100 lines, arcs and shapes, not listed
Bottom Paste:
  drawing of 99 lines, arcs and shapes, not listed
Top Solder:
  drawing of 99 lines, arcs and shapes, not listed
  text "KCORES" at 46.736,67.588 h3
  text "PCIe x8 to FlexibleLOM" at 46.736,65.644 h1.3
Bottom Solder:
  drawing of 99 lines, arcs and shapes, not listed
Document:
  lines w0.003: 91.034,59.157 91.084,59.207